# Altium PCB LimeSDR-Mini_2v5_Rounded.PcbDoc (part 5 of 7)
Units mm, origin at the board's own origin, x right, y up, seen from the top; angles counter-clockwise.
Board outline 69 x 31.37 mm, 8 copper layers (Top, L2, L3, L4, L5, L6, L7, Bottom), stack 1.555 mm thick; 439 components, 294 nets, 1986 pads, 831 vias.
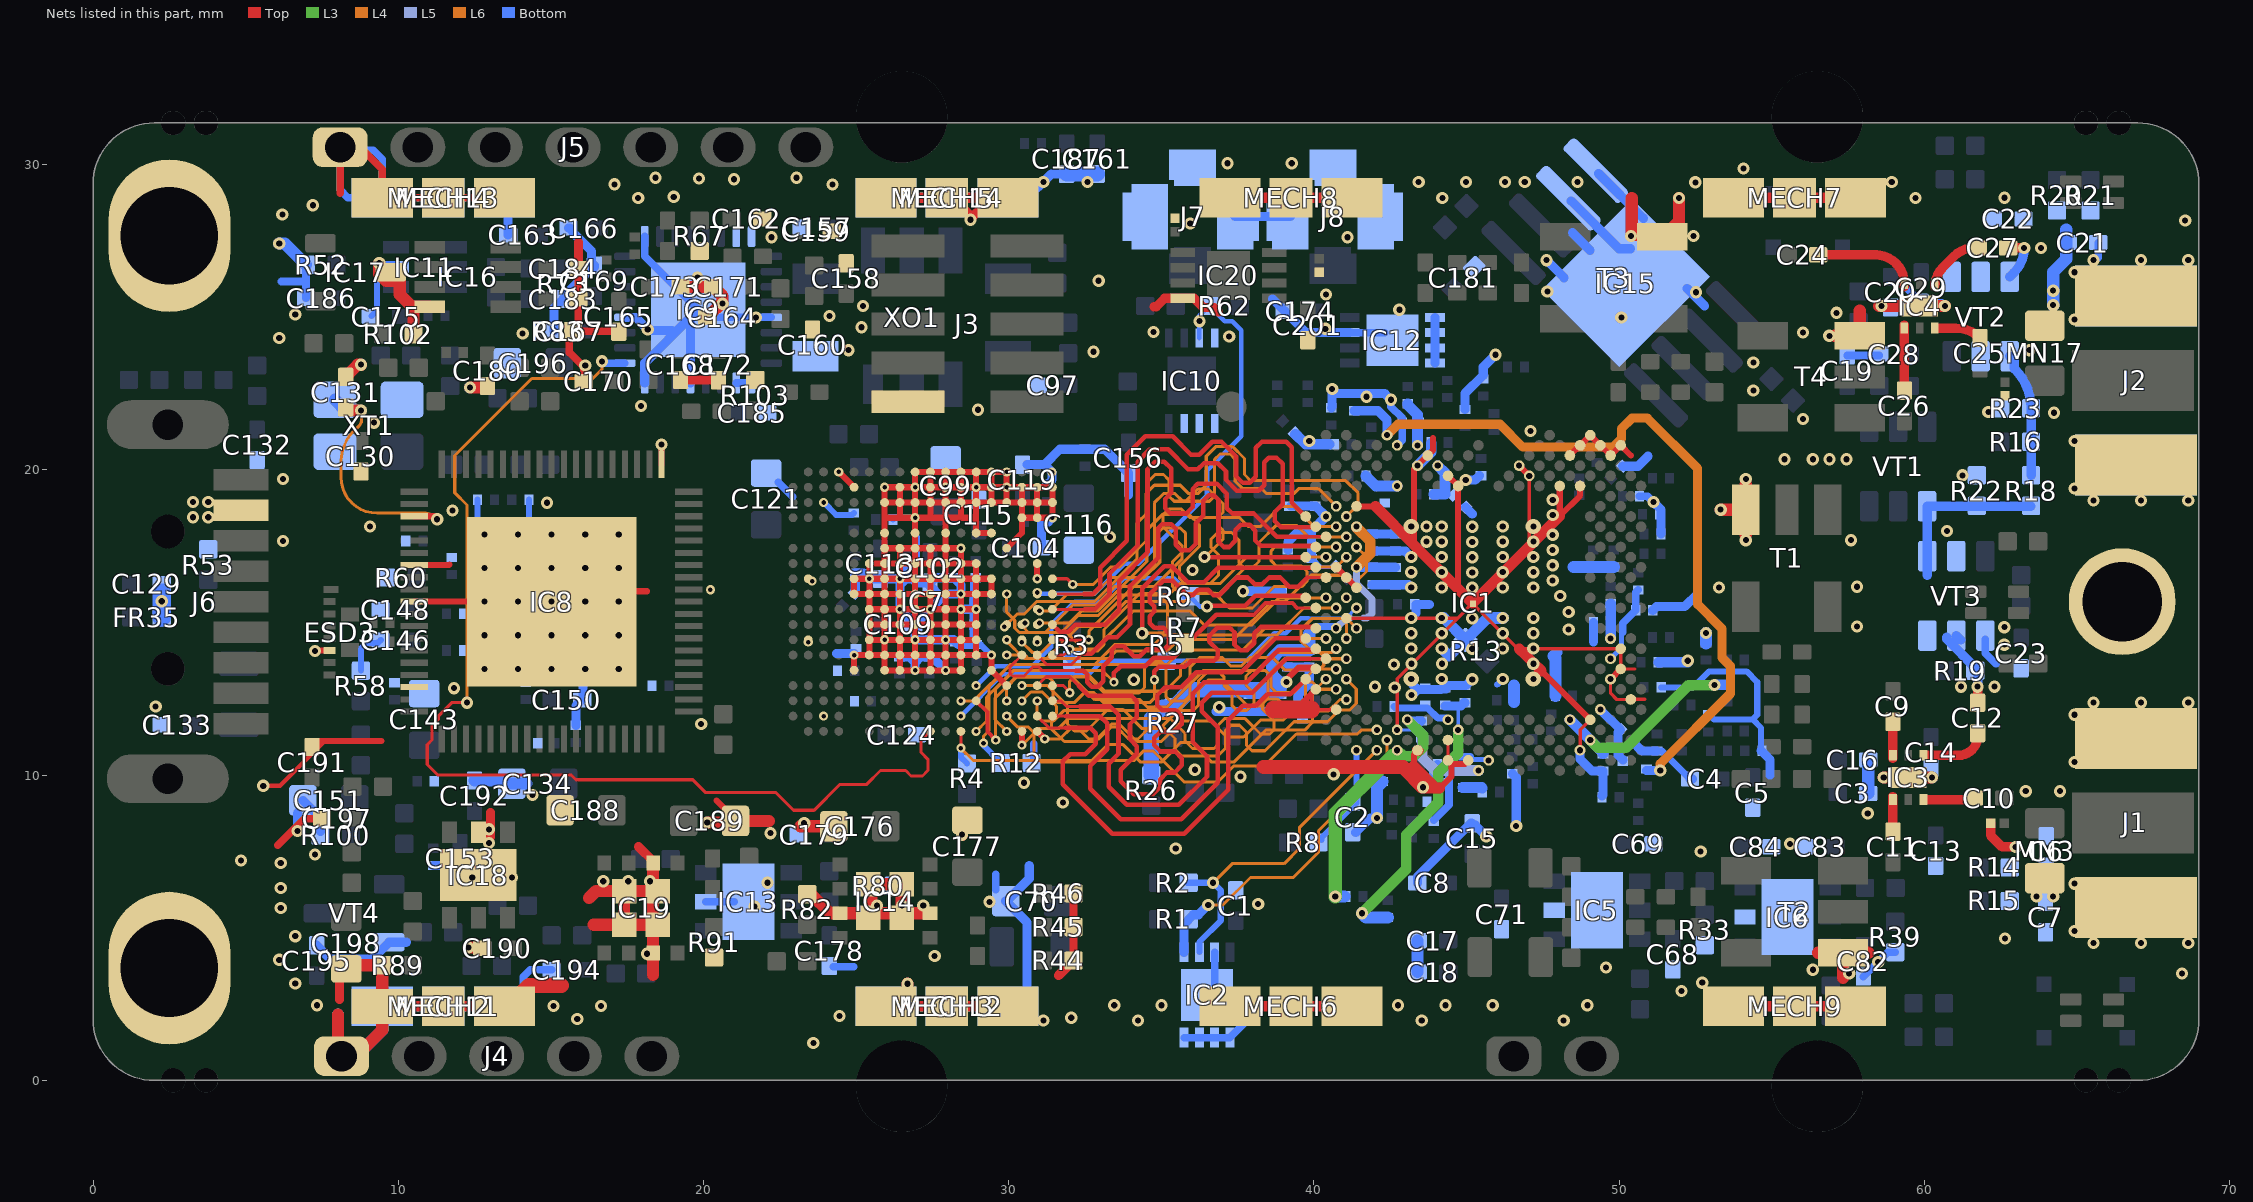
[diagram p10: the nets of this part, all layers, seen from the top]

## Via types
v1: diameter 0.4, hole 0.2, Top to Bottom, tented both sides, 554 vias
v2: diameter 0.3, hole 0.15, Top to Bottom, tented both sides, 160 vias
v3: diameter 0.35, hole 0.2, Top to Bottom, tented both sides, 88 vias
v4: diameter 0.5, hole 0.2, Top to Bottom, tented bottom, 25 vias
v5: diameter 0.5, hole 0.2, Top to Bottom, tented both sides, 4 vias

## Nets (pads, with @x,y where several pads share a name; then routed paths per layer and width w, separated by ;. In a path a pad name is that pad's centre, name@x,y a point inside that pad or via, vN(x,y) a via of type N, cw(c..) or ccw(c..) an arc to the next point about the centre after c; other vN are vias at no path point) (continued)
FT_XO: C131.1 IC8.22 XT1.1 | length 8.6
  Top w0.2: IC8.22@10.525,18.485 11.175,18.485 v1(11.275,18.385)
  Top w0.4: C131.1@8.275,21.95 v1(8.775,21.95)
  L6 w0.1: v1(8.775,21.95) cw(c8.715,21.89) 8.8,21.89 8.8,21.65 cw(c8.517,21.65) 8.717,21.45 8.534,21.266 ccw(c9.52,20.28) 8.125,20.28 8.125,19.76 ccw(c9.3,19.76) 9.3,18.585 10.9,18.585 cw(c10.9,18.162) 11.199,18.461 v1(11.275,18.385)
  Bottom w0.4: XT1.1@7.925,22.3 8.275,21.95 v1(8.775,21.95)
GND: C1.2 C2.2 C3.2 C4.1 C5.2 C6.1 C7.2 C8.1 C13.1 C14.1 C15.1 C16.2 C17.2 C18.1 C19.2 C20.2 C21.1 C22.2 C23.2 C28.1 C29.1 C30.2 C31.2 C32.2 C33.2 C34.2 C35.1 C36.2 C37.2 C38.2 C39.2 C40.2 C41.2 C42.2 C43.2 C44.2 C45.2 C46.2 C47.2 C48.2 C49.1 C50.2 C51.2 C52.2 C53.2 C54.2 C55.2 C56.1 C57.2 C58.1 C59.1 C60.2 C61.2 C62.2 C63.2 C64.2 C65.2 C66.2 C67.2 C68.1 C69.1 C70.1 C71.1 C72.2 C73.2 C74.2 C75.2 C76.2 C77.2 C78.2 C79.2 C80.2 C81.2 C82.1 C83.1 C84.1 C85.2 C86.2 C87.2 C88.2 C89.2 C90.2 C91.2 C92.2 C93.2 C94.2 C95.2 C96.2 C97.1 C98.2 C99.1 C100.1 C101.2 C102.1 C103.2 C104.1 C105.2 C106.2 C107.2 C108.2 C109.1 C110.2 C111.1 C112.2 C113.1 C114.2 C115.1 C116.1 C117.1 C118.2 C119.1 C120.2 C121.1 C122.2 C123.2 C124.1 C125.2 C126.2 C129.2 C130.2 C131.2 C132.2 C133.2 C134.1 C135.1 C136.2 C137.1 C138.2 C139.1 C140.2 C141.1 C142.2 C143.1 C144.1 C145.2 C146.2 C147.2 C148.2 C149.2 C150.2 C151.1 C152.1 C153.2 C156.2 C157.1 C158.1 C159.1 C160.1 C161.1 C162.2 C163.1 C164.1 C165.1 C166.1 C167.1 C168.1 C169.1 C170.1 C171.1 C172.1 C173.1 C174.2 C175.2 C176.1 C177.1 C178.1 C179.1 C180.2 C181.2 C183.2 C184.2 C185.2 C186.1 C187.1 C188.1 C189.1 C190.1 C191.1 C192.1 C194.1 C195.2 C196.1 C197.1 C198.1 C201.2 ESD1.2 ESD2.2 ESD3.6 ESD4.2 ESD5.2 FR35.1 IC1.AA31 IC1.AF32 IC1.AG29 IC1.AJ7 IC1.AJ9 IC1.AJ19 IC1.AK12 IC1.AK20 IC1.AL13 IC1.AL23 IC1.AM4 IC1.AM8 IC1.AM22 IC1.AN3 IC1.AN5 IC1.AN7 IC1.AN25 IC1.AP6 IC1.B18 IC1.B20 IC1.C7 IC1.C23 IC1.D20 IC1.E25 IC1.F6 IC1.G31 IC1.GND IC1.H2 IC1.J33 IC1.K4 IC1.L3 IC1.N3 IC1.T30 IC1.V30 IC1.W29 IC1.Y30 IC2.1 IC2.2 IC2.3 IC2.4 IC2.7 IC2.PAD IC3.PAD IC4.PAD IC5.2 IC5.PAD IC6.2 IC6.PAD IC7.B3 IC7.B16 IC7.D4 IC7.E5 IC7.E7 IC7.E8 IC7.E9 IC7.E10 IC7.E11 IC7.E12 IC7.E14 IC7.F5 IC7.F6 IC7.F7 IC7.F8 IC7.F9 IC7.F10 IC7.F11 IC7.F12 IC7.F13 IC7.F14 IC7.G2 IC7.G6 IC7.G7 IC7.G8 IC7.G9 IC7.G10 IC7.G11 IC7.G12 IC7.G13 IC7.G17 IC7.H6 IC7.H7 IC7.H8 IC7.H9 IC7.H10 IC7.H11 IC7.H12 IC7.H13 IC7.J6 IC7.J7 IC7.J8 IC7.J9 IC7.J10 IC7.J11 IC7.J12 IC7.J13 IC7.K5 IC7.K6 IC7.K7 IC7.K8 IC7.K9 IC7.K10 IC7.K11 IC7.K12 IC7.K13 IC7.K14 IC7.L2 IC7.L5 IC7.L6 IC7.L7 IC7.L8 IC7.L9 IC7.L10 IC7.L11 IC7.L12 IC7.L13 IC7.L14 IC7.L17 IC7.M2 IC7.M6 IC7.M7 IC7.M8 IC7.M9 IC7.M10 IC7.M11 IC7.M12 IC7.M13 IC7.N4 IC7.N7 IC7.N8 IC7.N9 IC7.N10 IC7.N11 IC7.N12 IC7.P5 IC7.P6 IC7.P8 IC7.P10 IC7.P12 IC7.R1 IC7.R2 IC7.R3 IC7.R10 IC7.T1 IC7.T2 IC7.T3 IC7.T4 IC7.T5 IC7.T6 IC7.T7 IC7.T8 IC7.T9 IC7.T10 IC7.T11 IC7.T12 IC7.T16 IC7.U1 IC7.U2 IC7.U3 IC7.U4 IC7.U5 IC7.U6 IC7.U7 IC7.U8 IC7.U9 IC7.U10 IC7.U11 IC7.U12 IC7.U14 IC7.V4 IC7.V5 IC7.V6 IC7.V7 IC7.V8 IC7.V9 IC7.V10 IC7.V15 IC8.1 IC8.26 IC8.29 IC8.36 IC8.77 IC9.4 IC9.9 IC9.15 IC9.16 IC9.21 IC9.25 IC9.26 IC9.29 IC9.32 IC10.4 IC10.5 IC10.6 IC10.7 IC11.5 IC12.1 IC12.2 IC12.3 IC12.4 IC12.7 IC12.PAD IC13.2 IC13.PAD IC14.3 IC14.6 IC14.PAD IC15.3 IC15.4 IC15.PAD IC16.8 IC17.3 IC18.2 IC18.PAD IC19.3 IC19.6 IC19.PAD IC20.4 J1.2 J2.2 J3.9 J4.1 J5.1 J6.4 J7.2 J8.2 MECH2.1 MECH3.1 MECH4.1 MECH5.1 MECH6.1 MECH7.1 MECH8.1 MECH9.1 MECH11.1 MECH12.1 MECH13.1 MECH14.1 pad.2 R12.2 R13.2 R22.1 R23.1 R33.1 R39.1 R44.1 R45.1 R46.1 R52.2 R53.1 R58.1 R60.1 R67.1 R73.2 R80.2 R82.1 R83.2 R89.2 R91.1 R100.1 R102.2 R103.1 T1.1 T2.3 T3.1 T4.1 VT2.4 VT3.4 VT4.S XO1.4 XT1.2 XT1.4 | length 477.6
  Top w0.11: 39.926,12.676 39.926,12.402 40.179,12.149 IC1.G31@40.731,12.149 ; IC1.T30@41.064,15.146 44.711,15.146 ; v3(42.729,11.483) 42.729,13.164 44.204,14.639 44.711,15.146 ; IC1.B20@44.394,10.484 IC1.D20@44.394,11.15 ; 47.058,17.493 v3(47.058,19.808) ; v3(48.723,10.817) 48.723,11.483 IC1.F6@49.056,11.816 ; v3(49.722,13.148) 49.722,12.681 49.924,12.479 50.385,12.479 IC1.H2@50.388,12.482 50.849,12.482 ; IC1.L3@50.052,13.481 IC1.N3@50.052,14.047 ; IC1.L3@50.055,13.481 50.516,13.481 ; IC1.N3@50.055,14.147 46.725,14.147 46.68,14.147 45.196,15.631 44.711,15.146
  Top w0.15: v1(5.575,9.65) 6.125,9.65 7.55,11.075
  Top w0.2: C191.1@7.175,10.925 7.175,10.975 7.325,11.125 9.45,11.125 ; ESD3.6@7.742,14.085 v1@7.311,14.085 ; IC8.29@10.525,15.685 IC8.77@12.512,15.685 ; IC8.26@10.525,16.885 11.66,16.885 11.675,16.9 ; IC8.77@17.65,16.025 18.15,16.025 ; IC8.1@18.625,20.185 v1(18.625,20.835) ; 20.421,9.175 C189.1@20.847,8.749 ; v2(24.435,19.935) IC7.U14@24.935,19.435 ; IC7.E14@24.935,13.435 v2(24.935,13.935) IC7.F13@25.435,13.935 ; IC7.G13@25.435,14.435 IC7.G6@28.935,14.435 ; IC7.H13@25.435,14.935 IC7.H6@28.935,14.935 ; IC7.J13@25.435,15.435 v2(28.935,15.435) ; IC7.N12@25.935,17.435 IC7.N11@26.435,17.435 ; 25.935,18.435 v2(26.935,18.435) 28.925,18.435 ; IC7.T12@25.935,18.935 IC7.T10@26.935,18.935 ; IC7.E11@26.435,13.435 IC7.F11@26.435,13.935 ; 26.435,18.435 IC7.U11@26.435,19.435 ; IC7.E9@27.435,13.435 IC7.N9@27.435,17.435 ; 27.435,18.435 IC7.V9@27.435,19.935 ; v2(27.935,13.435) IC7.F8@27.935,13.935 ; IC7.V8@27.935,19.935 v2(27.935,19.435) IC7.T8@27.935,18.935 ; 28.435,18.435 IC7.U7@28.435,19.435 ; IC7.T7@28.435,18.935 IC7.V7@28.435,19.935 ; IC7.V6@28.935,19.935 v2(28.935,19.435) IC7.P6@28.935,17.935 IC7.P5@29.435,17.935 ; IC7.V5@29.435,19.935 IC7.T5@29.435,18.935 ; IC7.D4@29.935,12.935 IC7.E5@29.435,13.435 v2(29.435,13.935) IC7.F6@28.935,13.935 ; IC7.N4@29.935,17.435 30.435,17.935 IC7.T3@30.435,18.935 ; v2(30.935,16.435) IC7.M2@30.935,16.935 ; IC7.R2@30.935,18.435 IC7.U2@30.935,19.435 ; IC7.T1@31.435,18.935 IC7.T4@29.935,18.935 ; 39.476,12.226 39.926,12.676 IC1.J33@40.065,12.815 ; IC1.AA31@40.731,16.811 IC1.Y30@41.064,16.478 IC1.W29@41.397,16.145 ; IC1.AG29@41.397,18.809 42.018,18.809 ; 43.278,10.298 43.278,10.67 IC1.C23@43.41,10.802 ; 43.278,17.549 43.278,20.024 v3(43.395,20.141) IC1.AM22@43.845,20.591 ; IC1.AM22@43.728,20.474 43.9,20.646 43.9,21.05 ; 44.124,9.578 44.511,9.965 IC1.B20@44.511,10.367 ; IC1.B20@44.394,10.484 IC1.B20@44.511,10.367 ; IC1.AK20@44.394,19.808 IC1.AJ19@44.727,19.475 44.727,16.1 ; IC1.B18@45.06,10.484 44.943,10.367 IC1.B20@44.511,10.367 ; v3(46.725,20.141) v3(47.058,19.808) ; 47.456,13.416 IC1.F6@49.056,11.816 ; IC1.AJ9@48.057,19.475 48.057,18.492 48.723,19.158 IC1.AJ7@48.723,19.475 ; IC1.AM8@48.39,20.474 IC1.AN7@48.723,20.807 IC1.AP6@49.056,21.14 IC1.AN5@49.389,20.807 IC1.AM4@49.722,20.474 IC1.AN3@50.055,20.807 50.388,20.474 ; v3(49.722,13.148) IC1.L3@50.055,13.481 ; v1@7.311,14.085 ccw(c7.311,14.034) v1(7.275,14.07) cw(c7.311,14.034) v1@7.311,14.085 ; IC7.F13@25.435,13.935 IC7.F12@25.935,13.935 IC7.F11@26.435,13.935 ; IC7.F13@25.435,13.935 IC7.M13@25.435,16.935 IC7.M12@25.935,16.935 IC7.M11@26.435,16.935 ; IC7.F11@26.435,13.935 IC7.G11@26.435,14.435 IC7.H11@26.435,14.935 v2(26.435,15.435) IC7.K11@26.435,15.935 v2(26.435,16.435) IC7.M11@26.435,16.935 ; IC7.F11@26.435,13.935 IC7.F8@27.935,13.935 ; IC7.M11@26.435,16.935 IC7.N11@26.435,17.435 ; IC7.M11@26.435,16.935 IC7.M10@26.935,16.935 ; IC7.N11@26.435,17.435 IC7.N10@26.935,17.435 ; v2(26.935,13.435) v2(26.935,14.435) IC7.H10@26.935,14.935 IC7.J10@26.935,15.435 IC7.K10@26.935,15.935 IC7.L10@26.935,16.435 IC7.M10@26.935,16.935 ; v2(26.935,13.435) IC7.E7@28.435,13.435 v2(28.435,17.435) IC7.N8@27.935,17.435 ; v2(26.935,13.435) IC7.E12@25.935,13.435 IC7.P12@25.935,17.935 v2(25.935,19.435) IC7.U9@27.435,19.435 IC7.U7@28.435,19.435 ; IC7.M10@26.935,16.935 IC7.N10@26.935,17.435 ; IC7.M10@26.935,16.935 IC7.M8@27.935,16.935 ; IC7.N10@26.935,17.435 IC7.N8@27.935,17.435 ; IC7.N10@26.935,17.435 IC7.P10@26.935,17.935 IC7.T10@26.935,18.935 ; IC7.T10@26.935,18.935 IC7.T9@27.435,18.935 IC7.T8@27.935,18.935 ; IC7.T10@26.935,18.935 IC7.V10@26.935,19.935 v2(29.935,19.935) IC7.T4@29.935,18.935 ; IC7.F8@27.935,13.935 v2(27.935,14.435) IC7.H8@27.935,14.935 IC7.J8@27.935,15.435 IC7.K8@27.935,15.935 IC7.L8@27.935,16.435 IC7.M8@27.935,16.935 ; IC7.F8@27.935,13.935 IC7.F7@28.435,13.935 IC7.F6@28.935,13.935 ; IC7.M8@27.935,16.935 IC7.M7@28.435,16.935 IC7.M6@28.935,16.935 IC7.F6@28.935,13.935 ; IC7.M8@27.935,16.935 IC7.N8@27.935,17.435 ; IC7.N8@27.935,17.435 IC7.P8@27.935,17.935 IC7.T8@27.935,18.935 ; IC7.T8@27.935,18.935 IC7.T6@28.935,18.935 IC7.T5@29.435,18.935 ; IC7.U7@28.435,19.435 IC7.U5@29.435,19.435 IC7.U3@30.435,19.435 ; IC7.T5@29.435,18.935 IC7.T4@29.935,18.935 ; IC7.U3@30.435,19.435 IC7.R3@30.435,18.435 v2(31.435,18.435) IC7.U1@31.435,19.435 IC7.U3@30.435,19.435 ; IC7.K14@24.935,15.935 IC7.L14@24.935,16.435 IC7.L5@29.435,16.435 IC7.K5@29.435,15.935 IC7.K14@24.935,15.935
  Top w0.25: 6.05,7.7 6.925,8.575 C197.1@7.5,8.575 ; 8.096,29.071 8.096,30.475 8.85,30.475 9.475,29.85 MECH4.1@9.475,28.925 MECH4.1@11.475,28.925 MECH4.1@13.475,28.925 ; R83.2@15.6,24.375 15.6,23.85 16.075,23.375 C170.1@16.075,22.9 ; C184.2@15.9,26.6 C183.2@15.9,25.6 15.9,24.725 R83.2@15.725,24.55 C165.1@17.175,24.55 ; R44.1@32.125,3.925 R46.1@32.125,6.125
  Top w0.3: 8.075,2.65 C198.1@8.075,3.45 ; 13.025,7.975 13.025,8.775 ; C184.2@15.9,26.6 15.9,27.475 ; 17.871,7.654 IC19.6@18.35,7.175 ; C168.1@19.25,22.95 20.48,22.95 C172.1@20.49,22.94 ; MECH5.1@28.234,28.841 28.8,28.275 MECH5.1@29.366,28.841 ; 31.634,3.436 R44.1@32.124,3.926 ; 34.767,25.35 34.836,25.35 35.111,25.625 IC20.4@35.7,25.625 36.074,25.625 36.374,25.325 36.725,25.325 36.875,25.175
  Top w0.31: ESD1.2@62.175,8.425 62.175,8.025 62.55,7.65 v1(63,7.65)
  Top w0.35: MECH2.1@9.475,2.425 MECH2.1@11.475,2.425 MECH2.1@13.475,2.425 ; MECH3.1@25.975,2.425 MECH3.1@27.975,2.425 MECH3.1@29.975,2.425 ; MECH5.1@25.975,28.925 MECH5.1@27.975,28.925 MECH5.1@29.975,28.925 ; MECH6.1@37.25,2.425 MECH6.1@39.25,2.425 MECH6.1@41.25,2.425 ; MECH8.1@37.25,28.925 MECH8.1@39.25,28.925 MECH8.1@41.25,28.925 ; 42.018,18.809 43.278,17.549 44.727,16.1 45.196,15.631 47.058,17.493 47.204,17.639 48.057,18.492 ; 42.925,10.271 42.925,10.178 43.525,9.578 44.124,9.578 ; 43.278,10.298 43.761,9.814 43.875,9.701 ; IC1.C23@43.395,10.817 IC1.C23@43.41,10.802 ; 46.725,14.147 46.956,13.916 47.206,13.666 47.456,13.416 ; MECH9.1@53.75,2.425 MECH9.1@57.75,2.425 ; MECH7.1@53.75,28.925 MECH7.1@55.75,28.925 MECH7.1@57.75,28.925
  Top w0.4: 8.025,2.15 8.025,0.909 J4.1@8.139,0.795 8.62,0.795 9.475,1.65 MECH2.1@9.475,2.425 R89.2@9.475,3.775 C198.1@8.425,3.775 ; C131.2@8.275,23.05 8.275,23.1 8.325,23.15 8.375,23.15 8.675,23.45 v1(8.775,23.45) ; v1(9.375,26.775) 9.375,26.425 9.6,26.2 10.05,26.2 10.05,25.75 10.5,25.3 R102.2@10.5,24.45 ; 10.505,25.35 IC16.8@11.025,25.35 ; v1(12.3,4.35) 12.725,4.35 C190.1@12.75,4.325 ; v1(12.35,22.7) C180.2@12.925,22.7 ; 16.25,5.975 16.475,6.2 IC19.PAD@18.5,6.2 ; 16.4,5.1 IC19.PAD@18.35,5.1 ; IC19.PAD@17.4,4.973 IC19.PAD@17.4,6.073 ; 18.35,3.45 IC19.PAD@18.35,5.1 ; IC19.6@18.35,7.125 IC19.PAD@18.35,5.1 ; C173.1@19.25,26 C171.1@20.325,26 20.375,26 20.425,25.95 20.425,25.9 20.625,25.7 v1(20.625,25.45) 20.575,25.45 20.225,25.1 20.225,25.05 20.175,25 C164.1@20.125,25 ; v1(20.125,8.45) C189.1@21.05,8.45 ; C189.1@21.05,8.5 22.15,8.5 ; v1@23.175,8.325 C176.1@24.275,8.325 ; R82.1@23.527,6.1 24.152,5.475 IC14.6@27.425,5.475 ; IC14.PAD@25.4,6.425 IC14.PAD@26.5,6.425 IC14.PAD@26.5,5.325 ; IC14.PAD@25.5,5.325 IC14.PAD@25.5,6.425 ; MECH3.1@26.686,2.065 v1(26.686,3.165) ; v1(28.475,8.05) C177.1@28.475,8.652 ; v1@50.415,27.695 50.415,28.91 ; v1@50.515,27.695 51.515,27.695 51.96,28.14 v1(51.96,28.91) ; v1(53.33,18.7) T1.1@54.155,18.7 ; T1.1@54.155,17.875 T1.1@54.155,18.7 ; T1.1@54.155,19.525 T1.1@54.155,18.7 ; MECH7.1@55.6,28.775 MECH7.1@55.75,28.925 ; T2.3@56.515,4.18 T2.3@57.34,4.18 ; T4.1@57.065,24.395 T4.1@57.89,24.395 57.89,25.22 ; 57.34,3.355 T2.3@57.34,4.18 ; T2.3@58.165,4.18 T2.3@57.34,4.18 ; v1@58.525,25.375 v1(60.675,25.375) ; v1(58.675,9.925) IC3.PAD@59.425,9.925 ; IC3.PAD@59.5,9.925 v1(60.25,9.925)
  Top w0.45: 38.346,10.271 40.65,10.271 42.925,10.271
  Top w0.5: MECH2.1@13.475,2.298 14.282,3.105 15.35,3.105
  Top w0.6: 38.7,12.15 39.9,12.15
  Bottom w0.1: v3(42.729,11.483) 42.732,11.48 43.265,11.48 C33.2@43.525,11.22
  Bottom w0.11: C78.2@39.926,17.101 39.974,17.101 40.261,16.814 40.703,16.814 C72.2@40.703,16.844
  Bottom w0.2: R58.1@8.775,13.425 8.775,14.135 8.973,14.332 9.333,14.332 C146.2@9.425,14.425 ; C175.2@9.125,25.05 9.3,25.225 9.3,26.375 9.575,26.65 IC11.5@9.925,26.65 ; C141.1@12.595,19.025 12.595,17.73 12.65,17.675 ; 14.28,18.155 C136.2@14.28,19.025 ; v2(23.935,18.935) 24.345,18.525 24.865,18.525 C98.2@24.927,18.587 ; C110.2@26.205,18.385 26.255,18.435 v2(26.935,18.435) ; C105.2@26.625,16.82 26.77,16.82 26.988,17.038 26.988,17.808 ; C112.2@28.95,14.28 29.09,14.28 v2(29.435,13.935) ; 46.006,12.966 v1(46.191,13.151) ; C57.2@51.383,12.878 52.428,12.878 52.95,13.4 54.178,13.4 54.53,13.048 54.53,11.98 54.375,11.825 ; C94.2@52.925,12.005 53.105,11.825 54.375,11.825 ; C96.2@54.655,10.8 54.655,11.545 54.375,11.825
  Bottom w0.24: C85.2@51.246,10.791 51.409,10.791 C4.1@52.325,9.875
  Bottom w0.25: 6.175,26.175 6.975,26.175 ; C186.1@6.975,25.625 R52.2@6.975,26.725 ; MECH13.1@13.475,28.925 MECH13.1@9.475,28.925 ; MECH11.1@14.1,2.5 14.1,3.4 14.325,3.625 C194.1@15.025,3.625 ; IC9.9@18.075,27.65 18.075,27 IC9.4@19.825,25.25 ; IC9.4@19.95,25 IC9.21@22.225,25 ; IC13.2@20.075,5.85 IC13.PAD@21,5.85 ; IC9.26@21.075,22.85 IC9.25@21.575,22.85 ; C121.1@22.45,19.6 22.925,19.125 ; C178.1@24.252,3.725 24.924,3.725 ; C70.1@29.575,6.25 29.575,6.745 ; R12.2@30.825,10.527 30.825,11.022 ; IC2.4@35.75,1.4 IC2.3@36.25,1.4 IC2.2@36.75,1.4 IC2.1@37.25,1.4 37.825,1.975 ; IC2.PAD@36.75,3.05 IC2.7@36.75,4.2 ; IC12.7@41.175,24.5 IC12.PAD@42.325,24.5 ; v1(42.525,22.3) 42.525,22.077 42.895,21.707 C52.2@42.895,21.55 42.895,20.973 v3(42.729,20.807) ; C63.2@50.668,19.142 50.933,19.142 v1(51.125,18.95) ; C19.2@57.475,23.75 C28.1@58.525,23.75 ; C82.1@58.006,3.4 58.806,4.2 R39.1@59.05,4.2 ; C20.2@58.9,25.325 59.75,25.325 C29.1@59.9,25.475 59.376,26.001 ; C29.1@59.9,25.475 v1@60.572,25.475 ; VT3.4@62,14.448 62,14 62.35,13.65 ; v1@65.7,26.955 C21.1@65.7,27.45 ; MECH13.1@9.475,28.925 8.35,28.925 8.096,29.179 8.096,30.475 9.175,30.475 9.475,30.175 MECH13.1@9.475,28.925
  Bottom w0.3: v1(6.7,8.175) C151.1@6.7,8.75 ; C151.1@6.875,9.175 7.45,8.6 R100.1@7.45,8.152 ; C195.2@7.325,4.425 7.775,3.975 9.15,3.975 VT4.S@9.7,4.525 10.26,4.525 ; C152.1@11.15,7.045 11.755,7.045 C153.2@12.025,6.775 ; MECH13.1@13.475,28.925 13.6,28.8 C163.1@13.6,27.7 ; C167.1@15.1,24.55 15.1,25.3 R73.2@15.4,25.6 15.55,25.75 15.55,25.825 16.275,26.55 16.325,26.55 16.425,26.65 C169.1@16.425,26.7 16.334,26.791 16.334,27.166 15.725,27.775 15.725,27.825 15.625,27.925 C166.1@15.575,27.925 ; C135.1@15.82,11.635 15.82,12.27 16.05,12.5 16.05,13.15 ; IC9.4@17.425,25 17.775,25 18.2,24.575 IC9.4@18.975,24.575 ; IC9.32@18.075,22.85 18.075,23.5 IC9.4@19.575,25 ; IC9.29@19.575,22.85 IC9.4@19.575,25 ; IC9.4@19.825,25.25 IC9.4@19.575,25 ; 24.36,13.985 v2@24.935,13.985 ; C100.1@24.975,15.958 C126.2@24.975,16.62 25.25,16.62 v2(25.435,16.435) v2(26.435,16.435) 26.84,16.435 26.975,16.3 C102.1@27.425,16.3 27.595,16.47 C107.2@28.2,16.47 28.435,16.235 v2(28.435,15.935) 27.935,15.935 27.812,15.813 ; C108.2@26.425,13.88 26.745,13.88 26.935,13.69 ; C105.2@26.625,16.82 26.625,16.423 26.435,16.232 v2(26.435,15.435) C109.1@26.935,14.935 ; v2(26.935,13.435) 26.935,13.69 ; C102.1@27.375,16.25 27.812,15.813 ; v2(27.935,13.435) 27.49,13.88 C103.2@27.4,13.88 27.125,13.88 26.935,13.69 ; v2(28.435,15.435) v2(28.935,15.435) ; C106.2@28.87,15.735 C118.2@28.87,14.925 28.87,14.36 C112.2@28.95,14.28 28.352,14.28 C122.2@28.26,14.372 28.197,14.435 v2(26.935,14.435) C109.1@26.935,14.935 ; C106.2@28.875,15.685 C111.1@28.875,16.42 ; MECH14.1@30.5,28.8 31.4,29.7 C187.1@31.9,29.7 ; MECH12.1@30.6,2.425 30.6,5.175 C70.1@29.9,5.875 29.936,5.875 30.675,6.614 30.675,7.034 ; C119.1@30.6,20.175 31.175,20.175 ; C104.1@31.08,17.45 C101.2@31.08,18.3 31.3,18.3 v2(31.435,18.435) ; C117.1@31.275,19.53 31.425,19.68 v2(31.425,19.925) 31.175,20.175 ; 33.925,19.177 C156.2@33.925,19.9 33.145,20.68 C120.2@32.5,20.68 31.68,20.68 31.175,20.175 ; v1@36.79,12.091 38.151,12.091 C38.2@38.926,12.091 39.33,12.091 39.426,12.188 ; J7.2@37.425,28.3 J8.2@38.925,28.3 J8.2@39.225,28.3 ; v1(37.675,16.025) C76.2@38.95,16.025 ; 38.65,25.6 C174.2@39.05,25.2 39.75,24.5 IC12.7@41.175,24.5 ; C39.2@39.094,13.534 C40.2@39.806,13.534 ; C79.2@39.151,17.376 39.151,17.646 39.509,18.004 39.926,18.004 ; C80.2@39.251,18.816 40.058,18.816 v3(40.398,18.476) 39.926,18.004 ; C74.2@39.646,11.968 39.426,12.188 ; C40.2@39.851,13.534 39.851,13.001 39.49,12.64 C75.2@39.49,12.441 39.49,12.252 39.426,12.188 ; C78.2@39.926,17.101 39.926,18.004 ; C95.2@40.575,22.038 40.6,22.063 v1(40.6,22.65) 40.749,22.501 42.324,22.501 v1(42.525,22.3) ; C2.2@41.375,8.125 41.846,8.596 v1(42.071,8.596) ; C41.2@41.901,16.241 43.101,16.241 v1(43.191,16.151) ; C30.2@41.901,17.341 43.001,17.341 v1(43.191,17.151) ; v1(43.191,15.151) 43.351,15.311 43.351,15.596 43.781,15.596 ; v1(43.2,12.625) 43.227,12.625 43.407,12.805 ; v5@43.227,12.985 43.407,12.805 ; C8.1@43.392,6.467 43.392,6.67 45.147,8.425 C15.1@45.175,8.425 ; C46.2@43.77,9.725 43.77,9.75 43.93,9.91 43.93,10.2 44.055,10.325 C61.2@44.055,10.35 ; IC12.4@43.975,23.5 IC12.3@43.975,24 IC12.2@43.975,24.5 IC12.1@43.975,25 ; C54.2@44.95,21.98 44.95,22.505 45.55,23.105 45.55,23.375 v1(45.95,23.775) ; C36.2@44.971,18.779 45.191,18.559 ; v1(44.976,19.671) 45.281,19.671 C90.2@45.426,19.816 ; v1(45.191,13.141) 45.181,13.141 44.975,12.935 C47.2@44.95,12.935 44.431,12.935 44.327,12.831 44.189,12.831 44.163,12.805 43.407,12.805 ; C15.1@45.291,8.359 v1(45.65,8) ; C87.2@46.505,10.045 46.63,9.92 v1(46.63,8.33) ; v1(47.625,26.875) IC15.PAD@48.2,26.3 ; IC15.3@48.43,28.818 49.998,27.25 IC15.PAD@50.375,27.25 ; 48.475,27.775 IC15.PAD@49.05,27.2 ; v3(48.723,10.817) 48.723,10.527 49.11,10.14 C45.2@49.474,10.14 49.474,9.354 C59.1@49.445,9.325 ; 49.165,14.37 C44.2@49.165,15 ; IC15.4@49.328,29.716 IC15.PAD@50.797,28.247 ; C55.2@50.123,20.123 50.623,20.123 50.95,20.45 ; C43.2@50.449,11.089 50.747,10.791 C85.2@51.246,10.791 ; C35.1@51.105,15.4 51.23,15.525 52.15,15.525 52.575,15.95 ; v1(51.125,18.95) 51.38,18.695 C91.2@51.38,17.9 ; IC15.PAD@52.225,25.95 52.8,25.375 ; C4.1@52.325,9.875 C4.1@52.409,9.875 ; C96.2@54.655,10.8 54.95,10.505 54.95,10 ; C109.1@26.935,14.935 v2(27.435,15.435) 27.812,15.813
  Bottom w0.35: MECH11.1@9.475,2.425 MECH11.1@11.475,2.425 MECH11.1@13.225,2.425 ; MECH12.1@25.975,2.425 MECH12.1@29.975,2.425 ; MECH14.1@25.975,28.925 MECH14.1@29.975,28.925 ; C89.2@39.399,21.173 39.731,20.841 40.501,20.841 ; v3(43.395,20.141) 43.845,20.59 C53.2@43.845,20.871 ; v1(44.191,14.151) 44.441,13.901 R13.2@44.971,14.431 ; v1@44.252,15.151 R13.2@44.971,14.431 ; C32.2@44.875,9.595 45.5,9.595 C86.2@45.52,9.575 ; 45.691,15.151 R13.2@44.971,14.431 ; 47.85,13.9 47.975,14.025 ; C92.2@51.303,13.7 v1@52.25,13.7
  Bottom w0.4: v1(6.1,27.42) 6.28,27.42 R52.2@6.975,26.725 ; 8.025,2.15 8.025,0.909 J4.1@8.139,0.795 8.62,0.795 9.475,1.65 MECH11.1@9.475,2.425 ; v1(9.375,26.775) 9.5,26.65 IC11.5@9.925,26.65 ; C192.1@12.5,9.825 13.5,9.825 13.6,9.725 14.2,9.725 ; v1(42.071,8.596) 42.071,9.611 C34.2@42.251,9.791 ; C18.1@43.4,3.55 C17.2@43.4,4.575 ; v1(44.191,15.151) v1@44.252,15.151 ; 45.691,15.151 v1(46.191,15.151) ; C88.2@46.555,12.4 46.555,12.93 ; 47.85,13.9 47.915,13.835 C58.1@47.915,12.6 ; 48.505,16.82 C56.1@49.15,16.82 C65.2@49.825,16.82 ; C60.2@52.85,14.325 v1(52.85,14.66) ; C3.2@58.165,9.4 C16.2@58.165,10.4
  Bottom w0.5: C187.1@31.9,29.7 C161.1@32.9,29.7
  Bottom w0.6: FR35.1@2.252,15.17 2.252,15.975
  other v1: 23.6,1.225 31.135,1.96 34.235,1.96 43.535,1.96 48.185,1.96 15.865,2.01 32.05,2.05 24.46,2.11 15.09,2.435 16.64,2.435 7.34,2.46 33.46,2.46 35.01,2.46 42.76,2.46 44.31,2.46 45.86,2.46 48.96,2.46 52.05,2.925 6.625,3.175 52.725,3.2 57.54,3.505 68.45,3.5 56.35,3.625 49.575,3.7 58.49,3.88 6.1,3.95 27.575,4.075 18.15,4.15 65.55,4.5 67.1,4.5 68.65,4.5 62.65,4.65 6.625,4.725 64.925,4.895 6.15,5.65 21.675,5.7 25.69,5.725 26.51,5.725 27.2,5.725 38.175,5.775 29.375,5.85 6.15,6.3 64.925,6.445 22.1,6.475 16.715,6.525 17.535,6.525 18.25,6.525 12.425,6.65 13.725,6.65 6.15,7.125 4.85,7.2 7.275,7.4 52.675,7.5 35.475,7.6 55.6,7.75 12.975,7.775 22.2,8.1 12.975,8.225 23.3,8.425 58.15,8.75 31.775,9.1 14.4,9.35 63.325,9.475 64.45,9.475 43.575,9.603 30.5,9.75 37.6,9.95 40.65,10.028 36.1,10.178 64.925,10.43 19.925,11.675 64.925,11.98 36.9,12.225 2.05,12.25 65.55,12.375 67.1,12.375 68.65,12.375 11.825,12.85 42.65,12.875 42,12.9 61.2,12.9 62.3,12.9 34.1,13.125 44.191,13.151 42.625,13.625 43.2,13.65 44.2,13.65 47.191,13.651 52.25,13.75 43.191,14.151 45.191,14.141 46.191,14.151 47.191,14.151 62.625,14.275 43.191,14.651 44.191,14.651 46.191,14.651 47.191,14.651 48.35,14.775 62.625,14.85 57.8,14.875 45.191,15.141 47.191,15.151 48.35,15.35 2.25,15.7 48.075,15.875 45.191,16.141 44.191,16.151 46.191,16.151 47.191,16.151 53.275,16.15 57.8,16.175 47.825,16.375 45.191,16.641 43.191,16.651 44.191,16.651 46.191,16.651 47.191,16.651 36.025,16.725 47.825,16.875 44.191,17.151 45.191,17.141 46.191,17.151 47.191,17.151 47.825,17.375 43.691,17.651 44.191,17.651 45.191,17.641 46.191,17.651 47.191,17.651 6.225,17.67 54.155,17.7 57.6,17.7 33.325,17.8 47.825,17.875 60.75,18 45.191,18.141 9.075,18.15 43.691,18.151 44.191,18.151 46.191,18.151 3.275,18.45 3.775,18.45 47.826,18.521 11.775,18.675 14.875,18.925 3.275,18.95 3.775,18.95 65.55,19 67.1,19 68.65,19 47.826,19.021 64.925,19.395 6.225,19.7 54.155,19.7 61.25,19.825 55.425,20.35 56.35,20.35 56.9,20.35 57.45,20.35 39.85,20.953 64.925,20.945 47.1,21.275 9.2,21.55 56.025,21.675 64.25,21.875 62.1,21.9 29,21.975 17.95,22.1 41.725,22.4 54.4,22.6 16.125,23.425 54.4,23.525 32.775,23.875 24.75,23.925 63.45,23.925 6.1,24.32 37.225,24.375 56.89,24.395 14.075,24.475 56.025,24.5 34.75,24.525 18.175,24.6 40.375,24.625 25.175,24.675 64.925,24.93 21.725,25 50.075,25 24.125,25.05 6.625,25.095 57.125,25.15 42.8,25.25 25.225,25.375 58.6,25.375 40.4,25.75 52.525,25.825 47.65,25.85 32.95,26.2 19.8,26.3 64.925,26.48 65.55,26.875 67.1,26.875 68.65,26.875 63.825,27.275 22.225,27.625 41.1,27.625 50.39,27.67 52.44,27.67 35.95,28.075 68.55,28.175 28.75,28.2 6.2,28.375 7.2,28.675 17.86,28.91 44.21,28.91 59.71,28.91 62.63,28.92 19.025,28.95 17.085,29.36 24.225,29.35 52.5,29.425 31.135,29.435 32.585,29.435 43.435,29.435 44.985,29.435 46.26,29.435 46.91,29.435 48.635,29.435 58.935,29.435 21,29.525 19.85,29.55 18.425,29.575 23.05,29.575 54.075,29.875 37.175,30.05 39.275,30.05
  other v2: 23.935,11.935 30.435,11.935 23.435,14.36 30.935,14.36 25.935,14.435 20.225,16.075 23.56,16.36 26.935,19.435 29.935,19.435
  other v3: 41.064,15.812
  other v4: 12.825,13.485 13.925,13.485 15.025,13.485 16.125,13.485 17.225,13.485 12.825,14.585 13.925,14.585 15.025,14.585 16.125,14.585 17.225,14.585 12.825,15.685 13.925,15.685 15.025,15.685 16.125,15.685 17.225,15.685 12.825,16.785 13.925,16.785 15.025,16.785 16.125,16.785 17.225,16.785 12.825,17.885 13.925,17.885 15.025,17.885 16.125,17.885 17.225,17.885
  other v5: 43.191,13.151 47.191,13.151 43.191,18.151 47.191,18.151
LM75_OS: IC7.K2 IC10.3 R62.1 | length 15.3
  Bottom w0.15: v2@31.01,15.985 31.046,15.949 32.814,15.949 33.79,16.925 34.25,16.925 36.5,19.175 36.5,19.975 37.625,21.1 37.625,24.575 37.325,24.875 37.075,24.875 R62.1@36.575,25.375 36.25,25.05 v1(36.25,24.875) IC10.3@36.25,24.325
  other v2: 30.935,15.985
LMK_CLK: IC7.A9 IC9.1 | length 37.4
  Top w0.1: v1(12.25,12.375) 11.75,12.375 11.325,11.95 11.325,11.847 11.1,11.622 11.1,11.15 10.95,11 10.95,10.35 11.3,10 15.675,10 15.825,9.85 19.65,9.85 20.075,9.425 22.375,9.425 22.95,8.85 23.625,8.85 24.475,9.7 25.35,9.7 25.8,10.15 26.625,10.15 26.8,9.975 27.175,9.975 27.35,10.15 27.35,10.525 27.125,10.75 27.125,11.125 IC7.A9@27.435,11.435
  L6 w0.1: v1(12.25,12.375) 12.25,18.85 11.85,19.25 11.85,20.475 14.375,23 16.375,23 16.675,23.3 v1(16.675,23.56)
  Bottom w0.25: v1(16.675,23.56) 16.716,23.56 16.776,23.5 IC9.1@17.425,23.5
LMS_CORE_LDO_EN: IC1.U33 IC7.C6 R7.1 | length 15.4
  Top w0.11: 39.451,15.479 IC1.U33@40.065,15.479
  Top w0.13: IC7.C6@28.935,12.435 29.3,12.07 29.3,11.425 v2(29.575,11.15) ; 38.03,15.25 38.416,15.636 39.294,15.636 39.451,15.479
  Top w0.15: v2(33.45,13.05) 33.45,13.35 33.675,13.575 34.475,13.575 34.75,13.85 35.4,13.85 36.8,15.25 38.03,15.25
  L4 w0.1: v2(29.575,11.15) 29.575,12.825 30.175,13.425 33.075,13.425 v2(33.45,13.05)
LMS_DIQ1_D0: IC1.AG31 IC7.J2 | length 15.4
  L4 w0.1: v2(31.01,15.385) 31.374,15.385 31.914,15.925 32.8,15.925 33.35,16.475 34.45,16.475 34.95,16.975 34.95,17.7 34.775,17.875 34.775,18.925 35.075,19.225 35.45,19.225 35.7,18.975 36.575,18.975 36.75,19.15 36.75,20.35 36.925,20.525 37.25,20.525 37.425,20.35 37.425,19.625 37.65,19.4 38.272,19.4 38.447,19.225 39.342,19.225 39.517,19.4 40.14,19.4 v3(40.731,18.809)
LMS_DIQ1_D1: IC1.AF30 IC7.L1 | length 15.5
  Top w0.1: IC7.L1@31.435,16.435 31.915,16.435 v2(32.1,16.25)
  L4 w0.1: v2(32.1,16.25) 32.775,16.25 33.35,16.825 33.65,16.825 34.5,17.675 34.5,19.225 34.775,19.5 35.625,19.5 35.9,19.225 36.2,19.225 36.475,19.5 36.475,20.45 36.8,20.775 37.325,20.775 37.725,20.375 37.725,19.85 37.925,19.65 41.05,19.65 41.45,19.25 41.45,18.862 v3(41.064,18.476)
LMS_DIQ1_D2: IC1.AF34 IC7.K1 | length 17
  Top w0.1: IC7.K1@31.435,15.935 32.46,15.935
  Top w0.15: 32.46,15.935 32.76,15.935 33,16.175 33,16.8 33.875,17.675 33.875,20.5 34.475,21.1 35.375,21.1 35.975,20.5 36.25,20.5 36.675,20.925 36.975,20.925 37.45,20.45 37.45,19.8 37.675,19.575 37.9,19.575 38.1,19.775 38.1,20.725 38.3,20.925 39.1,20.925 39.275,20.75 39.275,18.933 IC1.AF34@39.732,18.476
LMS_DIQ1_D3: IC1.AE31 IC7.K4 | length 16
  L4 w0.1: v2(29.935,15.935) 29.935,15.34 30.2,15.075 30.2,14.825 30.35,14.675 31.2,14.675 32.105,15.58 32.88,15.58 33.475,16.175 34.775,16.175 35.675,17.075 35.675,17.525 35.05,18.15 35.05,18.525 35.25,18.725 35.65,18.725 35.925,18.45 37.55,18.45 37.857,18.143 38.243,18.143 38.9,18.8 39.355,18.8 40.012,18.143 v3(40.731,18.143)
LMS_DIQ1_D4: IC1.AD30 IC7.G3 | length 15.4
  L4 w0.1: v2(30.435,14.36) 30.77,14.025 31.075,14.025 32.275,15.225 32.925,15.225 33.6,15.9 35.225,15.9 35.6,16.275 36.6,16.275 36.875,16.55 36.875,17.225 36.625,17.475 36.625,17.725 36.85,17.95 37.3,17.95 37.55,17.7 37.55,16.95 37.7,16.8 38,16.8 38.2,17 38.2,17.625 38.75,18.175 39.45,18.175 39.815,17.81 v3(41.064,17.81)
LMS_DIQ1_D5: IC1.AC29 IC7.F4 | length 14.1
  L6 w0.1: v2(29.935,13.935) 30.54,13.935 30.65,13.825 33.275,13.825 33.525,14.075 35.2,14.075 35.575,14.45 37.375,14.45 38.61,15.685 39.048,15.685 39.913,16.55 40.9,16.55 41.05,16.4 41.446,16.4 41.722,16.676 41.722,17.152 v3(41.397,17.477)
LMS_DIQ1_D6: IC1.AE33 IC7.J1 | length 17
  Top w0.1: IC7.J1@31.435,15.435 32.49,15.435
  Top w0.15: 32.49,15.435 32.823,15.435 33.304,15.917 33.304,16.604 34.225,17.525 34.225,20.275 34.625,20.675 35.225,20.675 35.875,20.025 36.2,20.025 36.4,20.225 36.85,20.225 37.121,19.954 37.121,19.679 37.475,19.325 38.2,19.325 38.379,19.504 38.379,20.254 38.525,20.4 38.775,20.4 38.975,20.2 38.975,18.875 38.725,18.625 38.725,18.325 38.924,18.126 40.048,18.126 IC1.AE33@40.065,18.143
LMS_DIQ1_D7: IC1.AD32 IC7.H1 | length 17
  Top w0.11: 39.79,17.81 IC1.AD32@40.398,17.81
  Top w0.15: IC7.H1@31.435,14.935 31.67,14.7 31.95,14.7 32.185,14.935 33.16,14.935 33.625,15.4 33.625,16.375 34.55,17.3 34.55,20.025 34.8,20.275 35.1,20.275 35.325,20.05 35.325,19.25 35.125,19.05 35.125,18.75 35.3,18.575 35.825,18.575 36.025,18.775 36.025,19.375 36.2,19.55 36.825,19.55 37.15,19.225 37.15,18.75 37.325,18.575 38.025,18.575 38.79,17.81 39.79,17.81
LMS_DIQ1_D8: IC1.AC31 IC7.G4 | length 15.7
  L4 w0.1: v2(29.935,14.435) 29.935,14.39 30.5,13.825 31.25,13.825 32.3,14.875 33.025,14.875 33.835,15.685 35.785,15.685 36.075,15.975 36.732,15.975 37.232,15.475 37.991,15.475 38.691,16.175 39.6,16.175 39.775,16.35 39.775,16.675 39.6,16.85 38.775,16.85 38.6,17.025 38.6,17.352 38.725,17.477 v3(40.731,17.477)
LMS_DIQ1_D9: IC1.AC33 IC7.F2 | length 17.1
  Top w0.1: IC7.F2@30.935,13.935 31.245,13.625 32.05,13.625 32.4,13.975
  Top w0.15: 32.4,13.975 32.7,13.975 33.25,14.525 33.55,14.525 33.975,14.95 33.975,16.2 34.9,17.125 34.9,18.1 35.025,18.225 35.325,18.225 35.475,18.075 35.475,17.55 35.65,17.375 35.925,17.375 36.125,17.575 36.125,18.25 36.375,18.5 36.375,19 36.55,19.175 36.725,19.175 36.875,19.025 36.875,17.65 37.05,17.475 37.225,17.475 37.425,17.675 37.425,18.025 37.6,18.2 37.896,18.2 38.086,18.011 38.086,17.689 38.256,17.519 40.023,17.519 IC1.AC33@40.065,17.477
LMS_DIQ1_D10: IC1.AB30 IC7.G1 | length 14.9
  Top w0.1: IC7.G1@31.435,14.435 v2(32.625,14.435)
  L6 w0.1: v2(32.625,14.435) 32.625,14.713 34.775,16.863 34.775,17.825 35.05,18.1 35.625,18.1 35.8,17.925 35.8,17.425 35.375,17 35.375,16.175 35.6,15.95 36.9,15.95 37.769,16.819 40.739,16.819 v3(41.064,17.144)
LMS_DIQ1_D11: IC1.AB32 IC7.H2 | length 14.7
  L6 w0.1: v2(31.01,14.985) 31.985,14.985 32.375,15.375 32.9,15.375 34.525,17 34.525,18.025 35.05,18.55 35.9,18.55 36.25,18.2 36.25,17.5 35.6,16.85 35.6,16.45 35.775,16.275 36.925,16.275 37.794,17.144 v3(40.398,17.144)
LMS_DIQ2_D0: IC1.H30 IC7.A3 | length 14.8
  Top w0.2: v2(30.435,10.985) IC7.A3@30.435,11.435
  L4 w0.1: v2(30.435,10.985) 30.975,11.525 31.625,11.525 31.95,11.85 35.3,11.85 35.775,11.375 35.775,11.125 36.025,10.875 36.725,10.875 36.85,11 36.85,11.625 37.075,11.85 37.75,11.85 38.25,11.35 38.55,11.35 38.7,11.5 38.7,11.775 38.325,12.15 38.325,12.403 38.425,12.503 38.797,12.503 39.2,12.1 40.476,12.1 40.858,12.482 v3(41.064,12.482)
LMS_DIQ2_D1: IC1.J31 IC7.C2 | length 14.6
  L4 w0.1: v2(30.935,12.435) 30.935,11.94 31.1,11.775 31.475,11.775 31.825,12.125 36.05,12.125 36.225,12.3 36.225,13.1 36.525,13.4 36.875,13.4 37.05,13.225 37.05,12.95 37.325,12.675 37.325,12.275 37.475,12.125 37.8,12.125 38.04,12.365 38.04,12.685 37.775,12.95 37.775,13.25 37.95,13.425 38.425,13.425 38.6,13.25 38.6,12.875 38.772,12.703 39.328,12.703 39.675,13.05 39.95,13.05 40.185,12.815 v3(40.731,12.815)
LMS_DIQ2_D2: IC1.K30 IC7.A2 | length 14.9
  Top w0.2: IC7.A2@30.935,11.435 v2(31.182,11.188)
  L4 w0.1: v2(31.182,11.188) 31.675,11.188 32.062,11.575 32.238,11.575 32.625,11.188 32.963,11.188 33.35,11.575 33.538,11.575 33.925,11.188 34.238,11.188 34.625,11.575 35.075,11.575 35.45,11.2 35.45,10.85 35.675,10.625 36.85,10.625 37.1,10.875 37.1,11.46 37.275,11.635 37.565,11.635 37.8,11.4 37.8,10.975 37.975,10.8 38.4,10.8 39.35,11.75 40.45,11.75 40.841,12.141 41.183,12.141 41.389,12.347 41.389,12.823 v3(41.064,13.148)
LMS_DIQ2_D3: IC1.K32 IC7.B4 | length 14.2
  L6 w0.1: v2(29.935,11.935) 30.297,11.572 30.653,11.572 30.825,11.4 30.825,10.675 31.075,10.425 32.675,10.425 33.25,11 33.75,11 34.325,10.425 35,10.425 35.65,11.075 36,11.075 36.65,10.425 37.375,10.425 38.425,11.475 39.7,11.475 39.95,11.725 39.95,12.7 v3(40.398,13.148)
LMS_DIQ2_D4: IC1.L31 IC7.C3 | length 14
  L6 w0.1: v2(30.435,12.435) 30.725,12.725 31.1,12.725 31.569,12.256 31.569,12.031 31.4,11.863 31.4,11.525 31.825,11.1 32.8,11.1 33.375,11.675 33.625,11.675 34.2,11.1 35,11.1 35.675,11.775 36.625,11.775 37.15,11.25 37.7,11.25 38.258,11.808 39.008,11.808 39.725,12.525 39.725,13.175 40.031,13.481 v3(40.731,13.481)
LMS_DIQ2_D5: IC1.K34 IC7.B2 | length 16.6
  Top w0.1: IC7.B2@30.935,11.935 31.32,11.55 31.85,11.55
  Top w0.15: 31.85,11.55 32.675,11.55 32.85,11.375 32.85,11.025 32.513,10.687 32.013,10.687 31.775,10.45 31.775,9.7 33.4,8.075 35.75,8.075 37.2,9.525 37.2,11.8 37.675,12.275 38.1,12.275 38.471,12.646 39.23,12.646 IC1.K34@39.732,13.148
LMS_DIQ2_D6: IC1.M30 IC7.D3 | length 14.2
  L6 w0.1: v2(30.435,12.935) 31.265,12.935 31.925,12.275 31.925,11.675 32.15,11.45 32.55,11.45 33.25,12.15 33.75,12.15 34.375,11.525 34.95,11.525 36.55,13.125 36.975,13.125 37.825,12.275 38.25,12.275 38.5,12.525 38.5,13.275 39.039,13.814 v3(41.064,13.814)
LMS_DIQ2_D7: IC1.M32 IC7.B1 | length 16.9
  Top w0.1: IC7.B1@31.435,11.935 31.875,11.935
  Top w0.11: 39.894,13.814 IC1.M32@40.398,13.814
  Top w0.15: 31.875,11.935 32.99,11.935 33.225,11.7 33.225,10.85 32.675,10.3 32.675,9.55 33.675,8.55 35.65,8.55 36.85,9.75 36.85,11.575 36.325,12.1 36.325,12.375 36.65,12.7 37.979,12.7 39.093,13.814 39.894,13.814
LMS_DIQ2_D8: IC1.N31 IC7.A4 | length 13.9
  L6 w0.1: v2(29.935,11.435) 29.55,11.82 29.55,12.525 30.25,13.225 32.075,13.225 32.825,12.475 34.3,12.475 34.55,12.225 35.175,12.225 36.375,13.425 38.125,13.425 38.714,14.014 40.598,14.014 v3(40.731,14.147)
LMS_DIQ2_D9: IC1.N33 IC7.C1 | length 16.3
  Top w0.1: IC7.C1@31.435,12.435 31.715,12.435 31.9,12.25 32.325,12.25
  Top w0.15: 32.325,12.25 33.325,12.25 33.6,11.975 33.6,10.7 33.275,10.375 33.275,9.625 33.875,9.025 35.575,9.025 36.5,9.95 36.5,10.625 36.025,11.1 36.025,12.675 36.4,13.05 37.8,13.05 38.855,14.105 40.065,14.105 IC1.N33@40.065,14.147
LMS_DIQ2_D10: IC1.P30 IC7.C7 | length 14.3
  L6 w0.1: v2(28.435,12.435) 28.86,12.435 30.05,13.625 35.2,13.625 35.675,14.1 37.675,14.1 38.375,14.8 39.625,14.8 39.963,15.138 40.866,15.138 41.064,14.94 v3(41.064,14.48)
LMS_DIQ2_D11: IC1.P32 IC7.A6 | length 13.9
  L6 w0.1: v2(28.935,11.435) 29.275,11.775 29.275,12.55 30.15,13.425 32.475,13.425 33.15,12.75 35.125,12.75 35.625,13.25 35.625,13.575 35.825,13.775 37.9,13.775 38.605,14.48 v3(40.398,14.48)
LMS_EN_IQSEL1: IC1.Y32 IC7.F3 | length 17
  Top w0.1: IC7.F3@30.435,13.935 30.05,13.55 30.05,13.325 30.125,13.25 30.5,13.25 30.8,13.55 30.975,13.55 31.1,13.425 32.2,13.425
  Top w0.11: 39.784,16.478 IC1.Y32@40.398,16.478
  Top w0.15: 32.2,13.425 32.45,13.425 32.575,13.3 32.575,13.05 32.725,12.9 32.925,12.9 33.1,13.075 33.1,13.575 33.375,13.85 33.375,14.1 33.5,14.225 33.775,14.225 34.1,13.9 34.3,13.9 34.525,14.125 35.1,14.125 35.25,14.275 35.25,14.65 35.075,14.825 34.775,14.825 34.625,14.975 34.625,15.212 34.775,15.362 34.775,15.538 34.625,15.687 34.625,15.925 35.075,16.375 35.375,16.375 35.85,15.9 36.037,15.9 36.212,16.075 36.538,16.075 36.712,15.9 36.9,15.9 37.478,16.478 37.833,16.478 38.061,16.25 38.314,16.25 38.542,16.478 38.897,16.478 39.2,16.175 39.481,16.175 39.784,16.478
LMS_EN_IQSEL2: IC1.R33 IC7.C4 | length 15
  Top w0.15: v2(34.775,13.125) 34.775,13.4 34.925,13.55 35.775,13.55 35.978,13.753 36.728,13.753 36.85,13.875 36.85,14.1 36.575,14.375 36.575,14.561 36.839,14.825 37.25,14.825 37.4,14.675 37.4,14.275 37.538,14.138 37.586,14.089 37.811,14.089 38.05,14.329 38.05,14.65 38.255,14.855 40.023,14.855 IC1.R33@40.065,14.813
  L4 w0.1: v2(29.935,12.435) 29.935,12.885 30.275,13.225 31.3,13.225 31.45,13.075 31.45,12.525 31.6,12.375 32.15,12.375 32.475,12.7 32.788,12.7 33.113,12.375 34.625,12.375 34.775,12.525 v2(34.775,13.125)
LMS_FCLK1: IC1.AA33 IC7.H3 | length 16
  Top w0.15: v1(34.375,14.65) 34.375,16.125 35.1,16.85 35.35,16.85 35.875,16.325 36.4,16.325 36.869,16.794 40.065,16.794 IC1.AA33@40.065,16.811
  L6 w0.1: v2@30.535,15.01 30.535,14.79 30.65,14.675 31.9,14.675 32.5,14.075 32.925,14.075 33.125,14.275 33.125,14.775 34.3,15.95 34.882,15.95 35.2,15.632 35.2,14.8 35.05,14.65 v1(34.375,14.65)
  other v2: 30.535,14.985
LMS_FCLK2: IC1.R29 IC7.D1 | length 16.8
  Top w0.1: IC7.D1@31.435,12.935 31.79,12.935 v2@31.95,12.775
  L4 w0.1: v2(32,12.7) 32,13.075 32.15,13.225 32.6,13.225 33.125,12.7 34.275,12.7 34.45,12.875 34.45,13.5 34.675,13.725 35,13.725 35.15,13.575 35.15,12.575 35.3,12.425 35.75,12.425 35.937,12.612 35.937,13.538 36.25,13.85 37,13.85 37.275,13.575 37.625,13.575 37.9,13.85 38.65,13.85 39.05,13.45 40.175,13.45 40.325,13.6 40.325,13.9 40.125,14.1 39.877,14.1 39.575,14.402 39.575,14.775 39.938,15.138 41.072,15.138 v3(41.397,14.813)
LMS_I2C_SCL: IC1.C27 IC2.6 R2.2 | length 11.1
  L4 w0.1: v1(36.7,6.475) 37.325,7.1 39.025,7.1 39.525,7.6 39.525,8.279 v3(42.063,10.817)
  Bottom w0.2: R2.2@35.85,6.475 v1(36.7,6.475) 36.95,6.225 36.95,5.233 36.25,4.533 IC2.6@36.25,4.2
LMS_I2C_SDA: IC1.D26 IC2.5 R1.2 | length 10.9
  L4 w0.1: v1(36.541,5.75) 37.025,5.75 37.925,6.65 39.325,6.65 40.15,7.475 40.15,8.175 42.396,10.421 v3(42.396,11.15)
  Bottom w0.3: IC2.5@35.75,4.2 35.75,5.125 36.05,5.425 36.216,5.425 v1(36.541,5.75)
LMS_MCLK1: IC1.AB34 IC7.H4 | length 17
  Top w0.15: v1(36.416,17.144) IC1.AB34@39.732,17.144
  L6 w0.1: v2(29.86,14.86) 30.275,15.275 30.5,15.275 30.91,15.685 32.81,15.685 34.2,17.075 34.2,18.25 34.575,18.625 34.575,19.625 34.8,19.85 35.075,19.85 35.25,19.675 35.25,19.15 35.425,18.975 35.8,18.975 36.2,19.375 36.55,19.375 37.025,18.9 37.025,18.607 36.85,18.432 36.85,18.196 37.025,18.021 37.025,17.728 v1@36.429,17.131
LMS_MCLK2: IC1.P34 IC7.D2 | length 19.3
  Top w0.1: IC7.D2@30.935,12.935 31.225,13.225 32,13.225 32.3,12.925
  Top w0.15: 32.3,12.925 32.625,12.6 34.025,12.6 34.2,12.425 34.2,11.9 33.975,11.675 33.975,11.175 34.2,10.95 34.2,10.7 33.675,10.175 33.675,9.8 34.1,9.375 34.725,9.375 34.963,9.613 34.963,9.862 35.188,10.088 35.438,10.088 35.675,10.325 35.675,10.55 35.45,10.775 34.975,10.775 34.775,10.975 34.775,11.225 34.975,11.425 35.425,11.425 35.675,11.675 35.675,11.925 35.475,12.125 35.025,12.125 34.875,12.275 34.875,12.625 35.125,12.875 35.65,12.875 36.15,13.375 37.625,13.375 38.73,14.48 IC1.P34@39.732,14.48
LMS_RESET: IC1.E27 IC7.A7 R4.1 | length 16.2
  Top w0.1: v2(28.435,10.885) IC7.A7@28.435,11.435
  L4 w0.1: v2(28.435,10.885) 28.845,10.475 34.1,10.475 34.424,10.799 34.726,10.799 35.75,9.775 36.85,9.775 37.375,10.3 38.375,10.3 39.425,11.35 41.425,11.35 41.55,11.475 42.055,11.475 v3(42.063,11.483)
  Bottom w0.2: v2(28.435,10.885) 28.435,10.585 R4.1@28.635,10.385
LMS_RXEN: IC1.V34 IC7.D6 R6.2 | length 13.5
  Top w0.15: v1@36.5,15.553 37.753,15.553 38.076,15.876 39.732,15.876 IC1.V34@39.732,15.812
  Bottom w0.15: v2(28.935,12.935) 29.575,13.575 30.775,13.575 31.4,14.2 31.4,14.925 32.16,15.685 33.01,15.685 33.775,16.45 35.406,16.45 35.721,16.135 35.721,15.86 35.758,15.823 35.966,15.823 36.262,15.528 v1(36.5,15.528) v1@36.425,15.453
LMS_TXEN: IC1.U29 IC7.B7 R5.2 | length 14.4
  Bottom w0.11: 39.825,15.143 41.061,15.143 v3(41.397,15.479)
  Bottom w0.15: v2(28.435,11.935) 29.8,13.3 32.625,13.3 33.075,13.75 R5.2@35.175,13.75 37.8,13.75 38.7,14.65 39.075,14.65 39.568,15.143 39.825,15.143
LMS_TXNRX1: IC1.V32 IC7.F1 R3.1 | length 10.7
  Top w0.1: IC7.F1@31.435,13.935 31.81,13.935 v2(32,14.125)
  L4 w0.1: v2(32,14.125) 32.825,14.125 34.075,15.375 35.95,15.375 36.4,14.925 37.975,14.925 38.862,15.812 v3(40.398,15.812)
  Bottom w0.15: v2(32,14.125) R3.1@32.15,13.975 ; v3@40.381,15.795 v3(40.398,15.812)
  Bottom w0.3: v2(32,14.125) 32,13.85 R3.1@32.075,13.775
LMS_TXNRX2: IC1.U31 R12.1 | length 15.1
  L4 w0.1: v2(29.175,11.05) 29.175,11.275 29.35,11.45 29.35,12.9 30.075,13.625 32.825,13.625 33.475,14.275 34.775,14.275 35.1,14.6 38.8,14.6 39.679,15.479 v3(40.731,15.479)
  Bottom w0.2: v2(29.175,11.05) 29.194,11.031 29.194,10.956 R12.1@29.637,10.512
NetC2_1: C2.1 IC1.C29 R8.1 | length 3.4
  Bottom w0.2: R8.1@40.251,7.871 40.251,7.946 41.397,9.092 v3(41.397,10.817)
NetC6_2: C6.2 C7.1 MN3.2 R14.2 R15.2
  other v1: 63.675,6.025 64.225,6.025
NetC9_1: C9.1 IC3.6 | length 1.2
  Top w0.309: IC3.6@58.975,10.55 C9.1@58.975,11.75
NetC10_1: C10.1 IC3.3 | length 1.6
  Top w0.309: IC3.3@60.025,9.2 C10.1@61.6,9.2
NetC11_1: C11.1 IC3.1 | length 1.2
  Top w0.309: C11.1@58.975,8.15 IC3.1@58.975,9.3
NetC12_1: C12.1 IC3.4 | length 2.1
  Top w0.309: IC3.4@60.025,10.65 61.125,10.65 ccw(c61.125,11.275) C12.1@61.75,11.275
NetC12_2: C12.2 R18.1 R19.1 R22.2 VT1.4 VT3.1 VT3.2 VT3.5 VT3.6 | length 8.4
  Top w0.309: C12.2@61.75,12.375 v1(61.75,12.9)
  Bottom w0.309: 60.094,16.55 VT1.4@60.094,18.811 R18.1@63.486,18.811 ; 60.737,14.513 60.737,14.463 61.7,13.5 61.75,13.5 v1(61.75,12.9) ; VT3.5@61.05,14.575 VT3.5@61.195,14.43
NetC21_2: C21.2 C22.1 MN17.2 R20.2 R21.2 | length 2.7
  Bottom w0.4: v1(64.225,25.4) v1(64.225,25.875) 64.225,26.487 64.65,26.912 64.65,27.875
NetC24_1: C24.1 IC4.6 | length 3.5
  Top w0.309: C24.1@56.525,27.05 58.45,27.05 ; 58.4,27.05 cw(c58.4,26.1) IC4.6@59.35,26.1 IC4.6@59.35,26
NetC25_1: C25.1 IC4.3 | length 1.5
  Top w0.309: IC4.3@60.425,24.65 61.036,24.65 cw(c61.036,23.531) C25.1@61.828,24.322
NetC26_1: C26.1 IC4.1 | length 2.2
  Top w0.309: IC4.1@59.35,24.75 IC4.1@59.35,24.65 59.35,22.841 ccw(c59.691,22.841) C26.1@59.45,22.6
NetC27_1: C27.1 IC4.4 | length 2.1
  Top w0.309: IC4.4@60.35,26.1 60.35,26 cw(c61.255,26) 60.615,26.64 60.975,27 cw(c61.639,26.336) 61.639,27.275 C27.1@61.7,27.275
NetC27_2: C27.2 R16.1 R18.2 R23.2 VT2.1 VT2.2 VT2.5 VT2.6 | length 5.7
  Top w0.309: C27.2@62.75,27.275 v1(63.275,27.275)
  Bottom w0.309: VT2.1@62.8,23.725 62.945,23.579 62.945,23.33 62.97,23.305 cw(c61.689,22.025) R23.2@63.5,22.025 R16.1@63.5,20.925 R18.2@63.5,19.825 ; VT2.6@62.8,26.325 62.939,26.464 ccw(c62.128,27.275) v1(63.275,27.275)
NetC30_1: C30.1 C31.1 C37.1 C38.1 C39.1 C40.1 C41.1 C42.1 IC1.AA29 IC1.AE29 IC1.L33 IC1.R31 R26.2 R27.2 | length 20.8
  Top w0.2: v1(39.1,13.053) 39.1,13.128 39.495,13.523 40.065,13.523 IC1.L33@40.065,13.481
  L4 w0.35: v3(41.397,16.811) 41.847,17.261 41.847,17.663 41.397,18.113 v3(41.397,18.143)
  L5 w0.11: 41.178,15.146 41.625,15.146
  L5 w0.23: v3(40.731,14.813) 41.064,15.146 41.178,15.146 ; v3(41.397,16.811) 41.397,16.275 41.902,15.77 41.902,15.302 41.746,15.146 41.625,15.146
  Bottom w0.23: 39.851,14.646 40.075,14.87 40.674,14.87 v3(40.731,14.813)
  Bottom w0.3: C37.1@37.875,12.653 C37.1@37.875,12.653 C38.1@38.926,12.651 38.926,12.879 v1(39.1,13.053) ; v3(41.397,16.811) 42.666,16.811 C42.1@42.676,16.801 ; v3(41.397,18.143) 41.639,17.901 C31.1@42.676,17.901
  Bottom w0.37: 38.625,13.315 38.887,13.053 v1(39.1,13.053)
  Bottom w0.4: 38.625,13.315 38.625,13.825 38.894,14.094 C40.1@39.851,14.094 39.851,14.646 ; C38.1@38.822,12.775 38.926,12.879
  Bottom w0.5: R26.2@34.675,10 34.675,11.85 35.05,12.225 R27.2@35.4,12.225 35.975,12.8 38.797,12.8 C38.1@38.822,12.775
NetC32_1: C32.1 C33.1 C34.1 FR3.1 IC1.A17 IC1.C25 IC1.F24 | length 13.2
  L3 w0.35: 42.575,10.625 42.921,10.625 ; v3(42.729,10.817) 42.921,10.625 ; v3(43.062,11.816) 43.575,11.303 43.575,10.925 43.275,10.625 42.921,10.625
  L3 w0.45: v1(40.7,6.025) 40.7,8.75 42.267,10.317 42.27,10.317 42.563,10.61 42.563,10.613 42.575,10.625
  L5 w0.35: v3(43.062,11.816) 43.55,11.329 43.55,10.575 43.974,10.151 v3(45.393,10.151)
  Bottom w0.25: C34.1@42.351,10.351 42.729,10.729 v3(42.729,10.817)
  Bottom w0.3: v3(43.062,11.816) 43.098,11.78 C33.1@43.525,11.78
  Bottom w0.35: C32.1@44.879,10.151 v3(45.393,10.151)
  Bottom w0.4: v1(40.7,6.025) FR3.1@40.995,6.025
NetC35_2: C35.2 FR2.1 IC1.M4 | length 2.6
  Bottom w0.17: v3(49.722,13.814) 50.085,14.177 50.085,14.685 50.105,14.705
  Bottom w0.25: 50.125,14.685 50.125,14.98 C35.2@50.545,15.4 50.545,15.99 FR2.1@50.625,16.07
NetC36_1: C36.1 FR1.1 IC1.AL21 | length 1.4
  Bottom w0.35: FR1.1@43.93,19.2 44.3,19.2 44.3,19.902 v3(44.061,20.141)
NetC43_1: C43.1 IC1.G5 R28.1 | length 2
  Bottom w0.3: v3(49.389,12.149) C43.1@50.053,11.485 49.969,11.401 49.969,10.661 R28.1@50.125,10.505
NetC44_1: C44.1 FR6.1 IC1.P4 | length 1.1
  Bottom w0.35: v3(49.722,14.48) 49.725,14.483 C44.1@49.725,15 FR6.1@49.725,15.62
NetC45_1: C45.1 FR17.1 IC1.D6 IC1.F8 | length 7
  L3 w0.35: v3(49.056,11.15) 49.306,10.9 50.225,10.9 52.275,12.95 v1(53.125,12.95)
  Bottom w0.35: v3(48.39,11.816) v3(49.056,11.15) 49.474,10.732 C45.1@49.474,10.7 ; v1(53.125,12.95) 53.135,12.96 FR17.1@53.55,12.96
NetC46_1: C46.1 FR16.1 IC1.B16 | length 3.6
  Bottom w0.17: 45.125,10.6 45.214,10.511 45.699,10.511 v3(45.726,10.484)
  Bottom w0.2: v3(45.726,10.484) v3@45.768,10.442
  Bottom w0.25: FR16.1@43.925,8.53 44.43,9.035 44.43,10.435 44.595,10.6 45.125,10.6
NetC47_1: C47.1 C48.1 FR15.1 IC1.E19 | length 9.7
  L3 w0.35: v1(41.575,5.475) 43.025,6.925 43.025,8.05 44.078,9.103 44.078,10.078 44.727,10.727 v3(44.727,11.483)
  Bottom w0.11: v3(44.727,11.483) 44.727,12.271
  Bottom w0.3: C48.1@44.302,12.271 44.727,12.271 44.821,12.271 44.925,12.375 C47.1@44.95,12.375
  Bottom w0.4: v1(41.575,5.475) 41.71,5.34 FR15.1@42.421,5.34
NetC49_2: C49.2 FR14.1 IC1.F20 | length 1.9
  Bottom w0.23: FR14.1@42.63,12.25 42.674,12.206 43.728,12.206 44.061,11.873 44.337,11.873 v3(44.394,11.816)
NetC50_1: C50.1 FR13.1 IC1.AJ25 | length 1.2
  Bottom w0.35: FR13.1@41.705,19.8 42.03,19.475 v3(42.729,19.475)
NetC51_1: C51.1 IC1.AP26 R29.1 | length 25.3
  L4 w0.3: v3(42.396,21.14) 42.756,21.5 46.1,21.5 46.85,20.75 49.8,20.75 50.075,21.025 50.075,21.35 50.425,21.7 50.925,21.7 52.575,20.05 52.575,15.6 53.375,14.8 53.375,13.85 53.65,13.575 53.65,12.675 51.35,10.375 v1(51.35,10.15)
  Bottom w0.3: C51.1@41.326,21.941 42.101,21.941 42.396,21.646 v3(42.396,21.14) ; R29.1@50.905,10.15 v1(51.35,10.15)
NetC52_1: C52.1 FR11.1 IC1.AN23 | length 1.5
  Bottom w0.35: FR11.1@43.075,22.17 43.075,22.131 43.395,21.811 v3(43.395,20.807)